# Altium PCB ORD_PCB.PcbDoc
Units mm, origin at the board's own origin, x right, y up, seen from the top; angles counter-clockwise.
Board outline 100.1 x 78.1 mm, 2 copper layers (Top Layer, Bottom Layer); 109 components, 87 nets, 378 pads, 0 vias.
Unrouted connection lines stored in the file: 241.
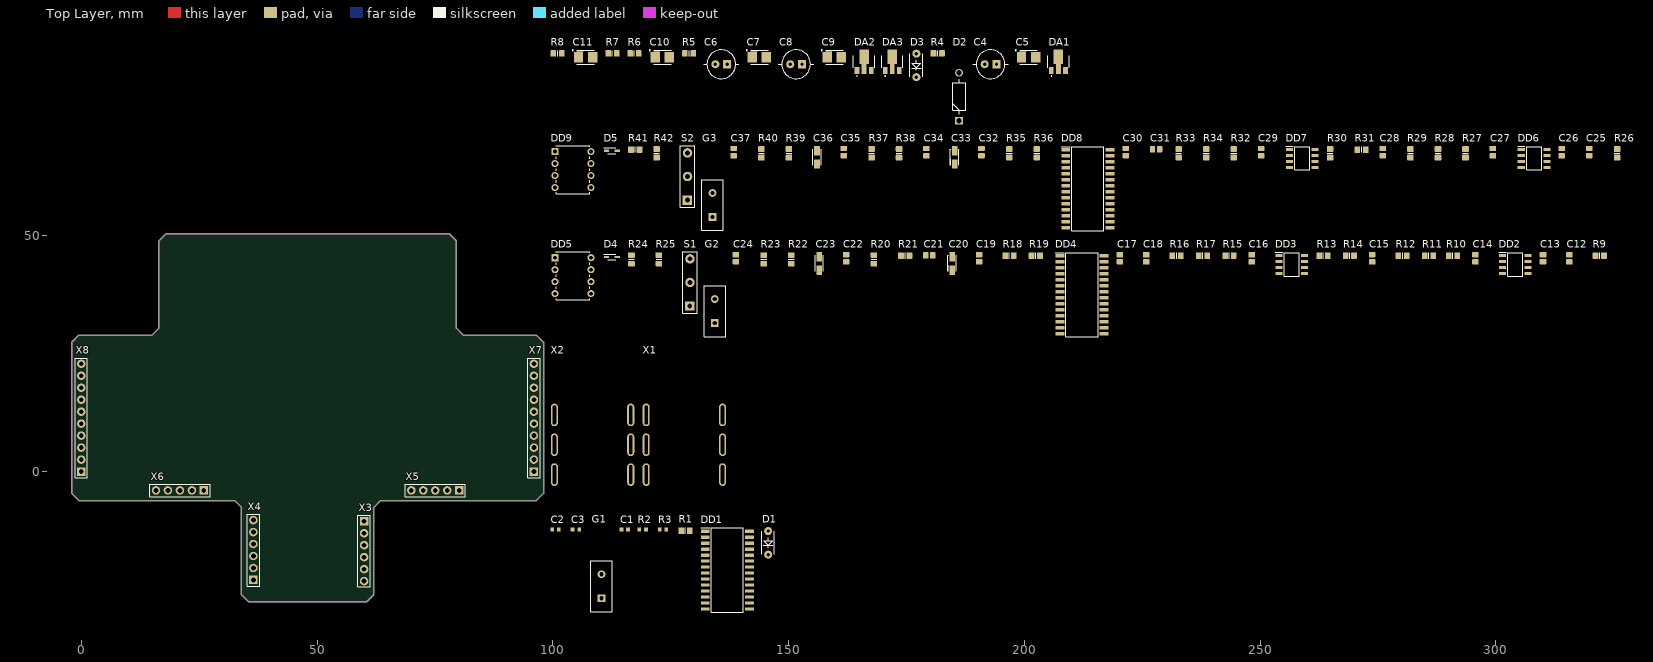
[diagram p0: Top Layer view]
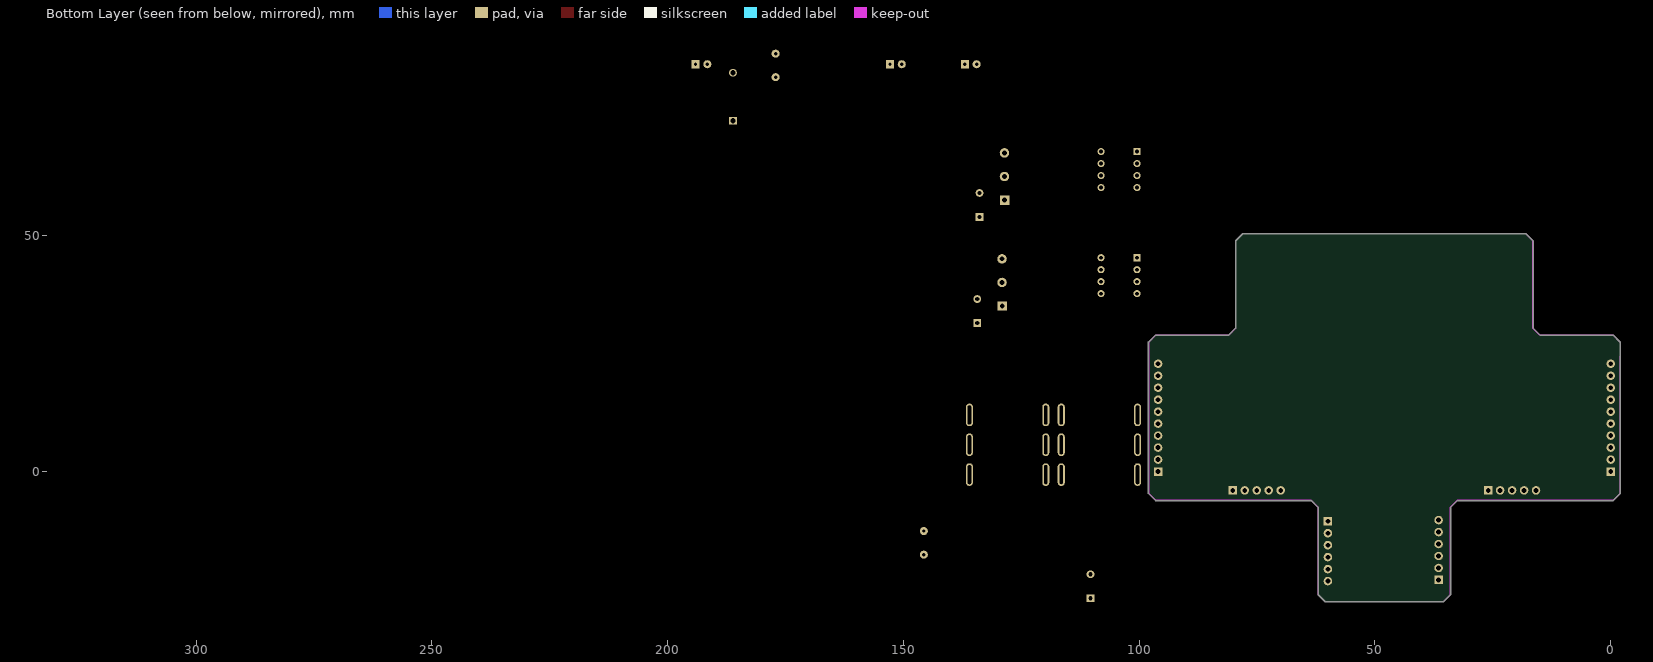
[diagram p1: Bottom Layer view, seen from below]

## Layer stack, top to bottom
Top Solder: solder mask 0.0102, Solder Resist, Dk 3.5
Top Layer: signal copper 0.0356
Dielectric 1: dielectric 0.32, FR-4, Dk 4.8
Bottom Layer: signal copper 0.0356
Bottom Solder: solder mask 0.0102, Solder Resist, Dk 3.5

## Board outline
-0.5,-6.15 32.479,-6.15 33.95,-7.621 33.95,-26.1 ccw(c34,-26.1) 33.966,-26.137 33.964,-26.136 35.464,-27.636 35.464,-27.635 ccw(c35.5,-27.6) 35.5,-27.65 60.5,-27.65 ccw(c60.5,-27.6) 60.537,-27.634 60.536,-27.636 62.036,-26.136 ccw(c62,-26.1) 62.05,-26.1 ccw(c62,-26.1) 62.05,-26.098 62.05,-7.621 63.521,-6.15 96.5,-6.15 ccw(c96.5,-6.1) 96.536,-6.135 96.536,-6.136 98.036,-4.636 98.035,-4.636 ccw(c98,-4.6) 98.05,-4.6 98.05,27.399 98.05,27.4 ccw(c98,27.4) 98.036,27.436 96.536,28.936 96.536,28.935 ccw(c96.5,28.9) 96.5,28.95 81.021,28.95 79.55,30.421 79.551,48.9 ccw(c79.5,48.9) 79.535,48.936 79.536,48.936 78.036,50.436 78.036,50.435 ccw(c78,50.4) 78,50.45 18,50.45 ccw(c18,50.4) 17.964,50.435 17.965,50.436 16.465,48.936 ccw(c16.5,48.9) 16.45,48.9 16.45,30.421 14.979,28.95 -0.5,28.95 ccw(c-0.5,28.9) -0.536,28.935 -0.536,28.936 -2.036,27.436 -2.035,27.436 ccw(c-2,27.4) -2.05,27.4 -2.05,-4.6 ccw(c-2,-4.6) -2.035,-4.636 -2.036,-4.636 -0.536,-6.136 -0.536,-6.135 ccw(c-0.5,-6.1)

## Design rules (kind name [scope] priority, off if disabled: settings)
Clearance [All] p1: gap=0.25 ignorepadtopadclearanceinfootprint=FALSE except(0: Arc-Hole Track-Hole SMDPad-Hole THPad-Hole Via-Hole Fill-Hole Poly-Hole Region-Hole Text-Hole)
Height [All] p1: minheight=0 maxheight=50 prefheight=12.7
PolygonConnect [All] p1: connectstyle=Relief reliefconductorwidth=0.254 reliefentries=4 polygonreliefangle="90 Angle" airgapwidth=0.254
RoutingVias [All] p1: holewidth=1 width=2 viastyle="Through Hole" minholewidth=0.6 minwidth=1.2 maxholewidth=10 maxwidth=10
SolderMaskExpansion [All] p1: expansion=0.102
Width [All] p1: maxlimit=3 minlimit=0.25 preferedwidth=0.25 minimp=50.000000 maximp=50.000000 favimp=50.000000
29 further rules are at their usual default settings.

## Classes and differential pairs
component class ORD_FV1_1: C12 C13 C14 C15 C16 C17 C18 C19 C20 C21 C22 C23 C24 D4 DD2 DD3 DD4 DD5 G2 R9 R10 R11 R12 R13 R14 R15 R16 R17 R18 R19 R20 R21 R22 R23 R24 R25 S1
component class ORD_CONNECTORS: X1 X2 X3 X4 X5 X6 X7 X8
component class ORD_FV1_2: C25 C26 C27 C28 C29 C30 C31 C32 C33 C34 C35 C36 C37 D5 DD6 DD7 DD8 DD9 G3 R26 R27 R28 R29 R30 R31 R32 R33 R34 R35 R36 R37 R38 R39 R40 R41 R42 S2
component class ORD_POWER: C4 C5 C6 C7 C8 C9 C10 C11 D2 D3 DA1 DA2 DA3 R4 R5 R6 R7 R8
component class ORD_CH341A: C1 C2 C3 D1 DD1 G1 R1 R2 R3

## Components (designator, comment, footprint, x,y, rotation, side; value= is the part's Value field where it differs from the comment)
C1 "4.7 nF" C0603[1608] 115.257,-12.274 r0 top
C2 "32 pF" C0603[1608] 100.581,-12.274 r0 top
C3 "32 pF" C0603[1608] 104.906,-12.274 r0 top
C4 "100 uF" K50-35 192.836,86.381 r0 top
C5 "47 uF" C3528_CASE-B 200.911,87.831 r0 top
C6 "100 uF" K50-35 135.733,86.381 r0 top
C7 "47 uF" C3528_CASE-B 143.808,87.831 r0 top
C8 "100 uF" K50-35 151.609,86.381 r0 top
C9 "100 uF" C3528_CASE-B 159.709,87.831 r0 top
C10 "47 uF" C3528_CASE-B 123.232,87.831 r0 top
C11 "47 uF" C3528_CASE-B 106.956,87.831 r0 top
C12 "470 pF" C0805[2012] 315.592,45.229 r90 top
C13 "220 pF" C0805[2012] 310.016,45.229 r90 top
C14 "1 uF" C0805[2012] 295.666,45.229 r90 top
C15 "1 uF" C0805[2012] 273.79,45.229 r90 top
C16 "1 uF" C0805[2012] 248.238,45.229 r90 top
C17 "1 uF" C0805[2012] 220.262,45.229 r90 top
C18 "1 uF" C0805[2012] 225.862,45.229 r90 top
C19 "100 nF" C0805[2012] 190.411,45.229 r90 top
C20 "1 uF" C3216_CASE-A 184.71,44.129 r90 top
C21 "2.2 nF" C0805[2012] 179.835,45.829 r0 top
C22 "1 nF" C0805[2012] 162.209,45.229 r90 top
C23 "1 uF" C3216_CASE-A 156.509,44.129 r90 top
C24 "15 pF" C0805[2012] 138.833,45.229 r90 top
C25 "470 pF" C0805[2012] 319.817,67.73 r90 top
C26 "220 pF" C0805[2012] 313.967,67.73 r90 top
C27 "1 uF" C0805[2012] 299.366,67.73 r90 top
C28 "1 uF" C0805[2012] 276.015,67.73 r90 top
C29 "1 uF" C0805[2012] 250.213,67.73 r90 top
C30 "1 uF" C0805[2012] 221.512,67.73 r90 top
C31 "1 uF" C0805[2012] 227.962,68.33 r0 top
C32 "100 nF" C0805[2012] 190.911,67.73 r90 top
C33 "1 uF" C3216_CASE-A 185.235,66.63 r90 top
C34 "2.2 nF" C0805[2012] 179.235,67.73 r90 top
C35 "1 nF" C0805[2012] 161.709,67.73 r90 top
C36 "1 uF" C3216_CASE-A 156.034,66.63 r90 top
C37 "15 pF" C0805[2012] 138.358,67.73 r90 top
D1 "Led" LED 145.683,-12.549 r90 top
D2 "1N4007" DO-41 186.16,74.38 r90 top
D3 "Led" LED 177.11,88.706 r90 top
D4 "BAT60A" SOD323 112.507,45.504 r0 top
D5 "BAT60A" SOD323 112.507,68.005 r0 top
DA1 "L78L33ABUTR" SOT-89 207.236,86.681 r0 top
DA2 "L78L33ABUTR" SOT-89 166.009,86.681 r0 top
DA3 "L78L33ABUTR" SOT-89 171.985,86.681 r0 top
DD1 "CH341A" SOIC28 137.008,-20.9 r0 top
DD2 "TL072CDR" SO8 304.141,43.904 r0 top
DD3 "TL072CDR" SO8 256.714,43.904 r0 top
DD4 "FV-1" SOIC28 212.237,37.478 r0 top
DD5 "24LC32A" DIP8_WITH_SOCKET 108.081,37.728 r0 top
DD6 "TL072CDR" SO8 308.116,66.405 r0 top
DD7 "TL072CDR" SO8 258.939,66.405 r0 top
DD8 "FV-1" SOIC28 213.487,59.979 r0 top
DD9 "24LC32A" DIP8_WITH_SOCKET 108.081,60.229 r0 top
G1 "12.000 MHz" HC-49 110.332,-26.875 r90 top
G2 "32768 MHz" HC-49 134.358,31.478 r90 top
G3 "32768 MHz" HC-49 133.858,53.979 r90 top
R1 "2.2 kOhm" R0805[2012] 128.132,-12.574 r0 top
R2 "0 Ohm" R0603[1608] 119.057,-12.274 r0 top
R3 "300 Ohm" R0603[1608] 123.382,-12.274 r0 top
R4 "300 Ohm" R0805[2012] 181.635,88.681 r0 top
R5 "10 kOhm" R0805[2012] 128.908,88.681 r0 top
R6 "10 kOhm" R0805[2012] 117.307,88.681 r0 top
R7 "10 kOhm" R0805[2012] 112.632,88.681 r0 top
R8 "10 kOhm" R0805[2012] 101.031,88.681 r0 top
R9 "22 kOhm" R0805[2012] 322.042,45.779 r0 top
R10 "100 Ohm" R0805[2012] 290.915,45.779 r0 top
R11 "15 kOhm" R0805[2012] 285.815,45.779 r0 top
R12 "100 kOhm" R0805[2012] 280.215,45.779 r0 top
R13 "15 kOhm" R0805[2012] 263.439,45.779 r0 top
R14 "15 kOhm" R0805[2012] 269.039,45.779 r0 top
R15 "100 kOhm" R0805[2012] 243.488,45.779 r0 top
R16 "15 kOhm" R0805[2012] 232.288,45.779 r0 top
R17 "15 kOhm" R0805[2012] 237.888,45.779 r0 top
R18 "1 kOhm" R0805[2012] 196.836,45.779 r0 top
R19 "1 kOhm" R0805[2012] 202.436,45.779 r0 top
R20 "1 MOhm" R0805[2012] 168.109,45.004 r90 top
R21 "1 MOhm" R0805[2012] 174.735,45.779 r0 top
R22 "100 Ohm" R0805[2012] 150.584,45.004 r90 top
R23 "1 kOhm" R0805[2012] 144.733,45.004 r90 top
R24 "10 kOhm" R0805[2012] 116.682,45.004 r90 top
R25 "10 kOhm" R0805[2012] 122.507,45.004 r90 top
R26 "22 kOhm" R0805[2012] 325.717,67.505 r90 top
R27 "100 Ohm" R0805[2012] 293.566,67.505 r90 top
R28 "15 kOhm" R0805[2012] 287.74,67.505 r90 top
R29 "100 kOhm" R0805[2012] 281.89,67.505 r90 top
R30 "15 kOhm" R0805[2012] 264.864,67.505 r90 top
R31 "15 kOhm" R0805[2012] 271.514,68.28 r0 top
R32 "100 kOhm" R0805[2012] 244.413,67.505 r90 top
R33 "15 kOhm" R0805[2012] 232.738,67.505 r90 top
R34 "15 kOhm" R0805[2012] 238.588,67.505 r90 top
R35 "1 kOhm" R0805[2012] 196.811,67.505 r90 top
R36 "1 kOhm" R0805[2012] 202.636,67.505 r90 top
R37 "1 MOhm" R0805[2012] 167.609,67.505 r90 top
R38 "1 MOhm" R0805[2012] 173.435,67.505 r90 top
R39 "100 Ohm" R0805[2012] 150.084,67.505 r90 top
R40 "1 kOhm" R0805[2012] 144.233,67.505 r90 top
R41 "10 kOhm" R0805[2012] 117.482,68.28 r0 top
R42 "10 kOhm" R0805[2012] 122.007,67.505 r90 top
S1 "MTS-103" MTS-103 129.058,35.103 r90 top
S2 "MTS-103" MTS-103 128.557,57.579 r90 top
X1 "Audio Jack 6.35 mm" "audio jack" 127.907,5.677 r0 top
X2 "Audio Jack 6.35 mm" "audio jack" 108.432,5.677 r0 top
X3 "Bypass Delay" "BYPASS PANEL" 59.975,-10.535 r270 top
X4 "Bypass Reverb" "BYPASS PANEL" 36.5,-22.995 r90 top
X5 "PBS5" pbs-5 80.16,-4 r180 top
X6 "PBS5" pbs-5 26,-4 r180 top
X7 "PBS10" PBS-10 96,0 r90 top
X8 "PBS10" PBS-10 0,0 r90 top

## Footprints (in the part's own frame and the unit in brackets; to place one, negate y for a bottom-side part, rotate by r counter-clockwise, add the part's x,y. Pads: shape width x height; smd on the part's side, far side on the other; paste and mask are expansions set on the pad)
"audio jack" [mm] "Audio Jack 6.35 mm"
  oval 1.5x4.8 hole 0.7 slot 4 at 90 deg: 1(-8.1,6.33) 2(8.1,6.33) 3(-8.1,0) 4(8.1,0) 5(-8.1,-6.33) 6(8.1,-6.33)
  body extent -9.1,-13.28 9.1,18.51, height 15.94
"BYPASS PANEL" [mm]
  rect 1.8x1.8 hole 1: 1(0,0)
  round 1.8 hole 1: 2(2.54,0) 3(5.08,0) 4(7.62,0) 5(10.16,0) 6(12.7,0)
  silkscreen extent -1.3,-1.3 13.95,1.3
C0603[1608] [mm] "Capacitor C0603[1608]"
  rrect25% 0.8x0.9 smd: 1(-0.7,0) 2(0.7,0)
  body extent -0.8,-0.4 0.8,0.4, height 0.8
C0805[2012] [mm] "Capacitor C0805[2012]"
  rrect25% 1.1x1.4 smd: 1(-0.75,0) 2(0.75,0)
  body extent -1,-0.62 1,0.63, height 0.9
C3216_CASE-A [mm] "Capacitor, SM Tantalum; Body 3.2 x 1.6 mm (LxW typ)"
  rect 2x1.2 smd: 1(-1.4,0) 2(1.4,0)
  silkscreen extent -1.7,-0.9 1.7,0.9, body extent -1.7,-0.84 1.7,0.84, height 1.71
C3528_CASE-B [mm] "Capacitor, SM Tantalum; Body 3.5 x 2.8 mm (LxW typ)"
  rect 2x2.2 smd: 1(-1.5,0) 2(1.5,0)
  silkscreen extent -2.82,-1.5 1.85,1.62, body extent -1.85,-1.46 1.85,1.47, height 2.03
DIP8_WITH_SOCKET [mm]
  rect 1.5x1.5 hole 0.8: 1(-7.62,7.62)
  round 1.5 hole 0.8: 2(-7.62,5.08) 3(-7.62,2.54) 4(-7.62,0) 5(0,0) 6(0,2.54) 7(0,5.08) 8(0,7.62)
  silkscreen extent -7.37,-1.27 -0.25,8.89, body extent -8.76,-1.21 1.14,8.89, height 7.36
DO-41 [mm]
  rect 1.65x1.65 / inner round 1.65 / far side rect 1.65x1.65 hole 1.1: 1(0,0)
  round 1.65 hole 1.1: 2(10.2,0)
  silkscreen extent 1.38,-1.38 8.82,1.35, body extent -0.39,-1.36 10.63,1.36, height 2.77
HC-49 [mm]
  rect 1.65x1.65 / inner round 1.65 / far side rect 1.65x1.65 hole 0.9: 1(0,0)
  round 1.65 hole 0.9: 2(5.1,0)
  silkscreen extent -2.85,-2.27 7.95,2.27, body extent -2.86,-2.25 7.94,2.25, height 3.5
K50-35 [mm]
  rect 1.7x1.7 hole 0.7: 1(1.25,0)
  round 1.7 hole 0.7: 2(-1.25,0)
  silkscreen extent -3.75,-3.05 3.75,3.05, body extent -3.18,-3.15 3.13,3.15, height 7.5
LED [mm]
  round 1.7 hole 0.7: 1(-5.075,0) 2(-0.075,0)
  silkscreen extent -5,-1.32 -0.15,1.4
MTS-103 [mm] "Switch ON-OFF-ON"
  rect 2x2 hole 1: 1(0,0)
  round 2 hole 1: 2(5,-0.025) 3(10,-0.025)
  silkscreen extent -1.5,-1.55 11.5,1.5
pbs-5 [mm]
  rect 1.8x1.8 hole 1: 1(0,0)
  round 1.8 hole 1: 2(2.54,0) 3(5.08,0) 4(7.62,0) 5(10.16,0)
  silkscreen extent -1.3,-1.3 11.46,1.3, body extent -1.3,-1.27 11.4,1.27, height 8.4
PBS-10 [mm]
  rect 1.8x1.8 hole 1: 1(0,0)
  round 1.8 hole 1: 2(2.54,0) 3(5.08,0) 4(7.62,0) 5(10.16,0) 6(12.7,0) 7(15.24,0) 8(17.78,0) 9(20.32,0) 10(22.86,0)
  silkscreen extent -1.3,-1.3 24.07,1.3, body extent -1.3,-1.27 24.1,1.27, height 8.4
R0603[1608] [mm] "Resistor R0603[1608]"
  rrect25% 0.8x0.9 smd: 1(-0.7,0) 2(0.7,0)
  body extent -0.8,-0.4 0.8,0.4, height 0.45
R0805[2012] [mm] "Resistor R0805[2012]"
  rrect25% 1.2x1.4 smd: 1(-0.9,0) 2(0.9,0)
  silkscreen extent 0,-0.6 0,0.6, body extent -1,-0.62 1,0.63, height 0.6
SO8 [mm]
  rect 1.525x0.65 smd: 1(-2.712,1.905) 2(-2.712,0.635) 3(-2.712,-0.635) 4(-2.712,-1.905) 5(2.712,-1.905) 6(2.712,-0.635) 7(2.712,0.635) 8(2.712,1.905)
  silkscreen extent -3.47,-2.45 1.6,2.58, body extent -3,-2.45 3,2.45, height 1.75
SOD323 [mm]
  rect 1.1x0.5 smd: 1(-1.15,0) 2(1.15,0)
  silkscreen extent -1.7,-0.63 0.85,0.63, body extent -1.25,-0.63 1.25,0.62, height 0.99
SOIC28 [mm]
  rect 1.87x0.7 smd: 1(-4.69,8.255) 2(-4.69,6.985) 3(-4.69,5.715) 4(-4.69,4.445) 5(-4.69,3.175) 6(-4.69,1.905) 7(-4.69,0.635) 8(-4.69,-0.635) 9(-4.69,-1.905) 10(-4.69,-3.175) 11(-4.69,-4.445) 12(-4.69,-5.715) 13(-4.69,-6.985) 14(-4.69,-8.255) 15(4.69,-8.255) 16(4.69,-6.985) 17(4.69,-5.715) 18(4.69,-4.445) 19(4.69,-3.175) 20(4.69,-1.905) 21(4.69,-0.635) 22(4.69,0.635) 23(4.69,1.905) 24(4.69,3.175) 25(4.69,4.445) 26(4.69,5.715) 27(4.69,6.985) 28(4.69,8.255)
  silkscreen extent -5.63,-8.94 3.4,8.96, body extent -5.15,-8.95 5.15,8.95, height 2.65
SOT-89 [mm]
  rect 1x1.5 smd: 1(-1.5,-1.65) 3(1.5,-1.65)
  rect 1x2.2 smd: 2(0,-1.3)
  rect 2x3 smd: 4(0,1.3)
  silkscreen extent -2.25,-2.9 2.25,1.5, body extent -2.25,-1.6 2.25,2.7, height 1.51

## Part data
C1 C2 C3 C12 C13 C14 C15 C16 C17 C18 C19 C21 C22 C24 C25 C26 C27 C28 C29 C30 C31 C32 C34 C35 C37: library part Capacitor
C4 C5 C6 C7 C8 C9 C10 C11 C20 C23 C33 C36: library part Capacitor_Pol
D4 D5: "Diode Schottky 10V 3A Automotive 2-Pin SOD-323 T/R", Arrow Part Number=BAT60A, Manufacturer_Part_Number=BAT60A
DA1 DA2 DA3: "Standard Regulator Pos 3.3V 0.1A L78L33ABUTR, Single Linear Voltage Regulator, 100mA 3.3 V, 3-Pin SOT-89", Manufacturer_Name="New Japan Radio", Manufacturer_Part_Number=NJM78L05UA-TE1, RS Part Number=7139502P, Allied_Number=R1030699, Allied Price/Stock=https://www.alliedelec.com/new-japan-radio-njm78l05ua-te1/R1030699/, Datasheet Link=http://uk.rs-online.com/web/p/products/7139502, RS Price/Stock=http://uk.rs-online.com/web/p/products/7139502P
DD1: "USB Bus Convert Chip CH341A", Manufacturer_Name="Spin Semiconductor", Manufacturer_Part_Number="FV-1 Reverb IC", Datasheet Link=http://www.spinsemi.com/Products/datasheets/spn1001/FV-1.pdf, Geometry.Height=2.51mm
DD2 DD3 DD6 DD7: "TL072CDR, Dual Operational Amplifier 4 MHz -18 to 18V, 8-Pin SO", Manufacturer_Name=STMicroelectronics, Manufacturer_Part_Number=LM358DT, Mouser Part Number=511-LM358DT, RS Part Number=7140827P, Allied_Number=70013708, Allied Price/Stock=http://www.alliedelec.com/stmicroelectronics-lm358dt/70013708/, Datasheet Link=http://www.st.com/st-web-ui/static/active/en/resource/technical/document/datasheet/CD00000464.pdf, Geometry.Height=1.75mm, Mouser Price/Stock=https://www.mouser.com/Search/Refine.aspx?Keyword=511-LM358DT, RS Price/Stock=http://uk.rs-online.com/web/p/products/7140827P
DD4 DD8: "FV-1 Reverb IC, Integrated Stereo ADC & DAC, Integrated Circuit, SOIC-28 300 MIL", Manufacturer_Name="Spin Semiconductor", Manufacturer_Part_Number="FV-1 Reverb IC", Datasheet Link=http://www.spinsemi.com/Products/datasheets/spn1001/FV-1.pdf, Geometry.Height=2.51mm
DD5 DD9: "32K I2C Serial EEPROM with Quarter-Array Write-Protect", Manufacturer_Name=Microchip, Manufacturer_Part_Number=24LC32AF-I/P, Mouser Part Number=579-24LC32AF-I/P, Allied_Number=70570177, Allied Price/Stock=https://www.alliedelec.com/microchip-technology-inc-24lc32af-i-p/70570177/, Mouser Price/Stock=https://www.mouser.com/Search/Refine.aspx?Keyword=579-24LC32AF-I%2FP
G1 G2 G3: library part Crystal_2pin
R1 R2 R3 R4 R5 R6 R7 R8 R9 R10 R11 R12 R13 R14 R15 R16 R17 R18 R19 R20 R21 R22 R23 R24 R25 R26 R27 R28 R29 R30 R31 R32 R33 R34 R35 R36 R37 R38 R39 R40 R41 R42: library part Resistor
S1 S2: "Switch, ON-OFF-ON"
X1 X2: library part "Audio Jack"
X3 X4: library part Bypass, "Rele or 3PDT"
X5 X6 X7 X8: "2.54 mm", System=Connector
D2: Geometry.Height=1.35mm, Manufacturer_Name=1N4007, Manufacturer_Part_Number=1N4007

## Nets (pads, with @x,y where several pads share a name; then routed paths per layer and width w, separated by ;. In a path a pad name is that pad's centre, name@x,y a point inside that pad or via, vN(x,y) a via of type N, cw(c..) or ccw(c..) an arc to the next point about the centre after c; other vN are vias at no path point)
3V3: DD8.23 R39.1 X8.1 X8.4 X8.8
3V3_USB: C9.1 D1.1 D4.2 D5.2 DA3.1
4V5_FV1: R15.1 R32.1
5V0_USB: C8.1 DA3.3 DD1.28 R4.2
9V0: C4.1 C6.1 D2.1 DA1.3 DA2.3 DD2.4 DD2.8 DD6.4 DD6.8 R5.2 R7.2
A_3V3: C5.1 D4.1 DA1.1 DD4.6 DD4.8 DD4.23 DD5.8 R22.1 R23.2 S1.2 X7.2 X7.4 X7.8
A_4V5: C10.1 DD2.3 DD2.5 R5.1 R6.2 R21.1 X5.2
A_CTRL0_2: DD4.20 X7.1
A_CTRL1_2: DD4.21 X7.5
A_CTRL2_2: DD4.22 X7.7
A_IN: C19.1 R20.2
A_MIX_1: R16.1 R17.2 X5.3
A_MIX_3: R13.1 R14.2 X5.1
A_OUT: C14.1 R12.2
A_SCL: DD4.14 DD5.6
A_SDA: DD4.15 DD5.5
A_VOL_1: C13.2 DD2.6 R14.1 R17.1 X5.4
A_VOL_3: C13.1 DD2.7 R11.1 X5.5
B_3V3: C7.1 D5.1 DA2.1 DD8.6 DD8.8 DD9.8 R40.2 S2.2
B_4V5: C11.1 DD6.3 DD6.5 R7.1 R8.2 R38.1 X6.2
B_CTRL0_2: DD8.20 X8.2
B_CTRL1_2: DD8.21 X8.5
B_CTRL2_2: DD8.22 X8.7
B_IN: C32.1 R37.2
B_MIX_1: R33.1 R34.2 X6.3
B_MIX_3: R30.1 R31.2 X6.1
B_OUT: C27.1 R29.2
B_SCL: DD8.14 DD9.6
B_SDA: DD8.15 DD9.5
B_VOL_1: C26.2 DD6.6 R31.1 R34.1 X6.4
B_VOL_3: C26.1 DD6.7 R28.1 X6.5
GND: C1.1 C2.1 C3.1 C4.2 C5.2 C6.2 C7.2 C8.2 C9.2 C10.2 C11.2 C20.2 C21.1 C22.1 C23.2 C24.2 C33.2 C34.1 C35.1 C36.2 C37.2 D2.2 D3.2 DA1.2 DA1.4 DA2.2 DA2.4 DA3.2 DA3.4 DD1.12 DD3.4 DD3.8 DD4.4 DD4.7 DD4.11 DD4.12 DD4.18 DD4.19 DD4.24 DD4.25 DD5.1 DD5.2 DD5.3 DD5.4 DD5.7 DD7.4 DD7.8 DD8.4 DD8.7 DD8.11 DD8.12 DD8.18 DD8.19 DD8.24 DD8.25 DD9.1 DD9.2 DD9.3 DD9.4 DD9.7 R1.1 R2.2 R6.1 R8.1 R12.1 R20.1 R24.1 R25.1 R29.1 R37.1 R41.1 R42.1 X1.1 X1.2 X2.1 X2.2
IN: X1.5
NetC1_2: C1.2 DD1.9
NetC2_2: C2.2 DD1.13 G1.1
NetC3_2: C3.2 DD1.14 G1.2
NetC12_1: C12.1 DD2.1 R9.2 R10.1
NetC12_2: C12.2 DD2.2 R9.1 R11.2
NetC14_2: C14.2 R10.2
NetC15_1: C15.1 DD3.6
NetC15_2: C15.2 R13.2
NetC16_1: C16.1 DD3.1 DD3.2
NetC16_2: C16.2 R16.2
NetC17_1: C17.1 DD3.7
NetC17_2: C17.2 R18.2
NetC18_1: C18.1 DD4.28
NetC18_2: C18.2 R19.2
NetC19_2: C19.2 DD3.5 R21.2
NetC20_1: C20.1 DD4.3
NetC21_2: C21.2 DD3.3 R15.2 R19.1
NetC22_2: C22.2 DD4.1 DD4.2 R18.1
NetC23_1: C23.1 DD4.26 R22.2
NetC24_1: C24.1 DD4.9 G2.1
NetC25_1: C25.1 DD6.1 R26.2 R27.1
NetC25_2: C25.2 DD6.2 R26.1 R28.2
NetC27_2: C27.2 R27.2
NetC28_1: C28.1 DD7.6
NetC28_2: C28.2 R30.2
NetC29_1: C29.1 DD7.1 DD7.2
NetC29_2: C29.2 R33.2
NetC30_1: C30.1 DD7.7
NetC30_2: C30.2 R35.2
NetC31_1: C31.1 DD8.28
NetC31_2: C31.2 R36.2
NetC32_2: C32.2 DD7.5 R38.2
NetC33_1: C33.1 DD8.3
NetC34_2: C34.2 DD7.3 R32.2 R36.1
NetC35_2: C35.2 DD8.1 DD8.2 R35.1
NetC36_1: C36.1 DD8.26 R39.2
NetC37_1: C37.1 DD8.9 G3.1
NetD1_2: D1.2 R3.2
NetD3_1: D3.1 R4.1
NetDD1_1: DD1.1 R1.2
NetDD1_27: DD1.27 R2.1
NetDD4_10: DD4.10 G2.2
NetDD4_13: DD4.13 R23.1
NetDD4_16: DD4.16 R24.2 S1.3
NetDD4_17: DD4.17 R25.2 S1.1
NetDD8_10: DD8.10 G3.2
NetDD8_13: DD8.13 R40.1
NetDD8_16: DD8.16 R41.2 S2.3
NetDD8_17: DD8.17 R42.2 S2.1
OUT: X2.5
SCL: DD1.24
SDA: DD1.23 R3.1
USB_N: DD1.11
USB_P: DD1.10
pads on no net: DD1.2 DD1.3 DD1.4 DD1.5 DD1.6 DD1.7 DD1.8 DD1.15 DD1.16 DD1.17 DD1.18 DD1.19 DD1.20 DD1.21 DD1.22 DD1.25 DD1.26 DD4.5 DD4.27 DD8.5 DD8.27 X1.3 X1.4 X1.6 X2.3 X2.4 X2.6 X3.1 X3.2 X3.3 X3.4 X3.5 X3.6 X4.1 X4.2 X4.3 X4.4 X4.5 X4.6 X7.3 X7.6 X7.9 X7.10 X8.3 X8.6 X8.9 X8.10

## Keep-outs
Keep-Out Layer:
  lines w0.1: -2,24.4 -2,-4.6 ; 97,-5.6 98,-4.6 ; -2,-4.6 -0.5,-6.1 32.5,-6.1 34,-7.6 34,-26.1 35.5,-27.6 ; -2,-4.6 -2,27.4 -0.5,28.9 15,28.9 16.5,30.4 16.5,48.9 18,50.4 78,50.4 79.5,48.9 79.5,30.4 81,28.9 96.5,28.9 98,27.4 98,-4.6 ; 35.5,-27.6 60.5,-27.6 ; 35.5,-27.6 60.5,-27.6 ; 60.5,-27.6 62,-26.1 62,-7.6 63.5,-6.1 96.5,-6.1 98,-4.6

## Other copper
Top Layer:
  region: 86.275,24.05